# Altium PCB LV-BMS_V2_21E.PcbDoc (part 1 of 2)
Units mil, origin at the board's own origin, x right, y up, seen from the top; angles counter-clockwise.
Board outline 5497.15 x 1737.62 mil, 4 copper layers (Top Layer, GND, VCC, Bottom Layer), stack 30.634 mil thick; 163 components, 85 nets, 905 pads, 78 vias.
Unrouted connection lines stored in the file: 5.
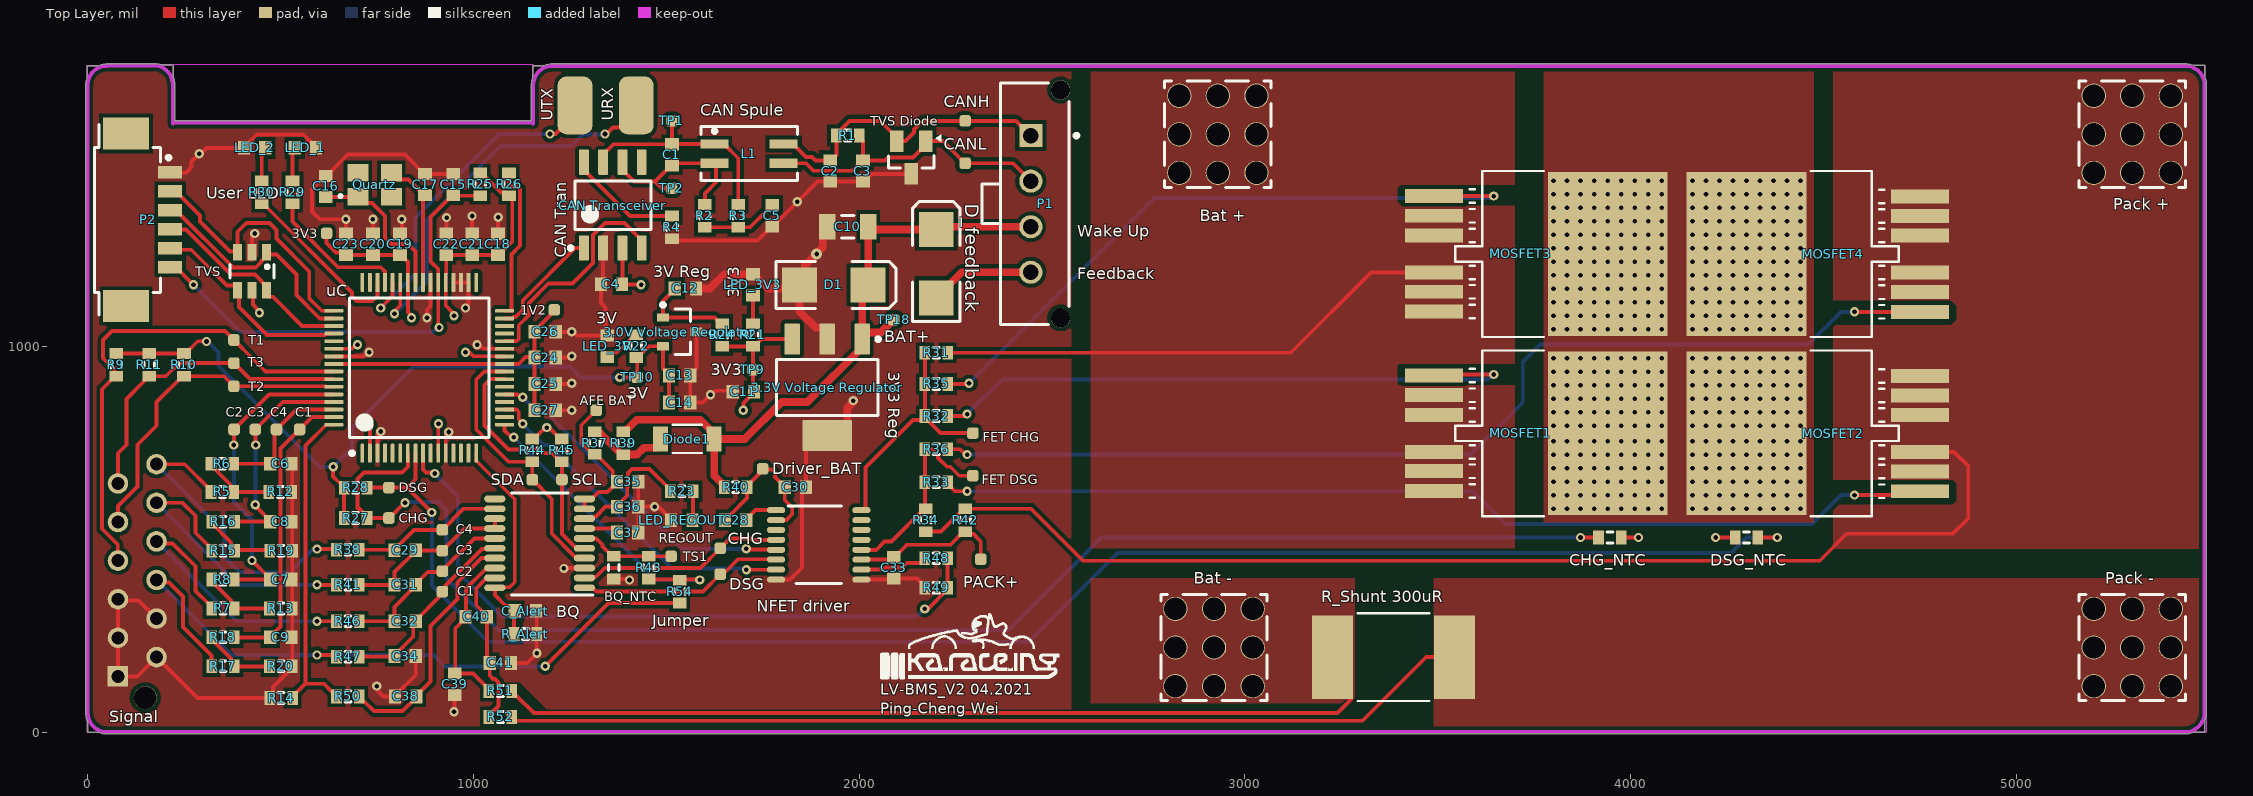
[diagram p0: Top Layer view]
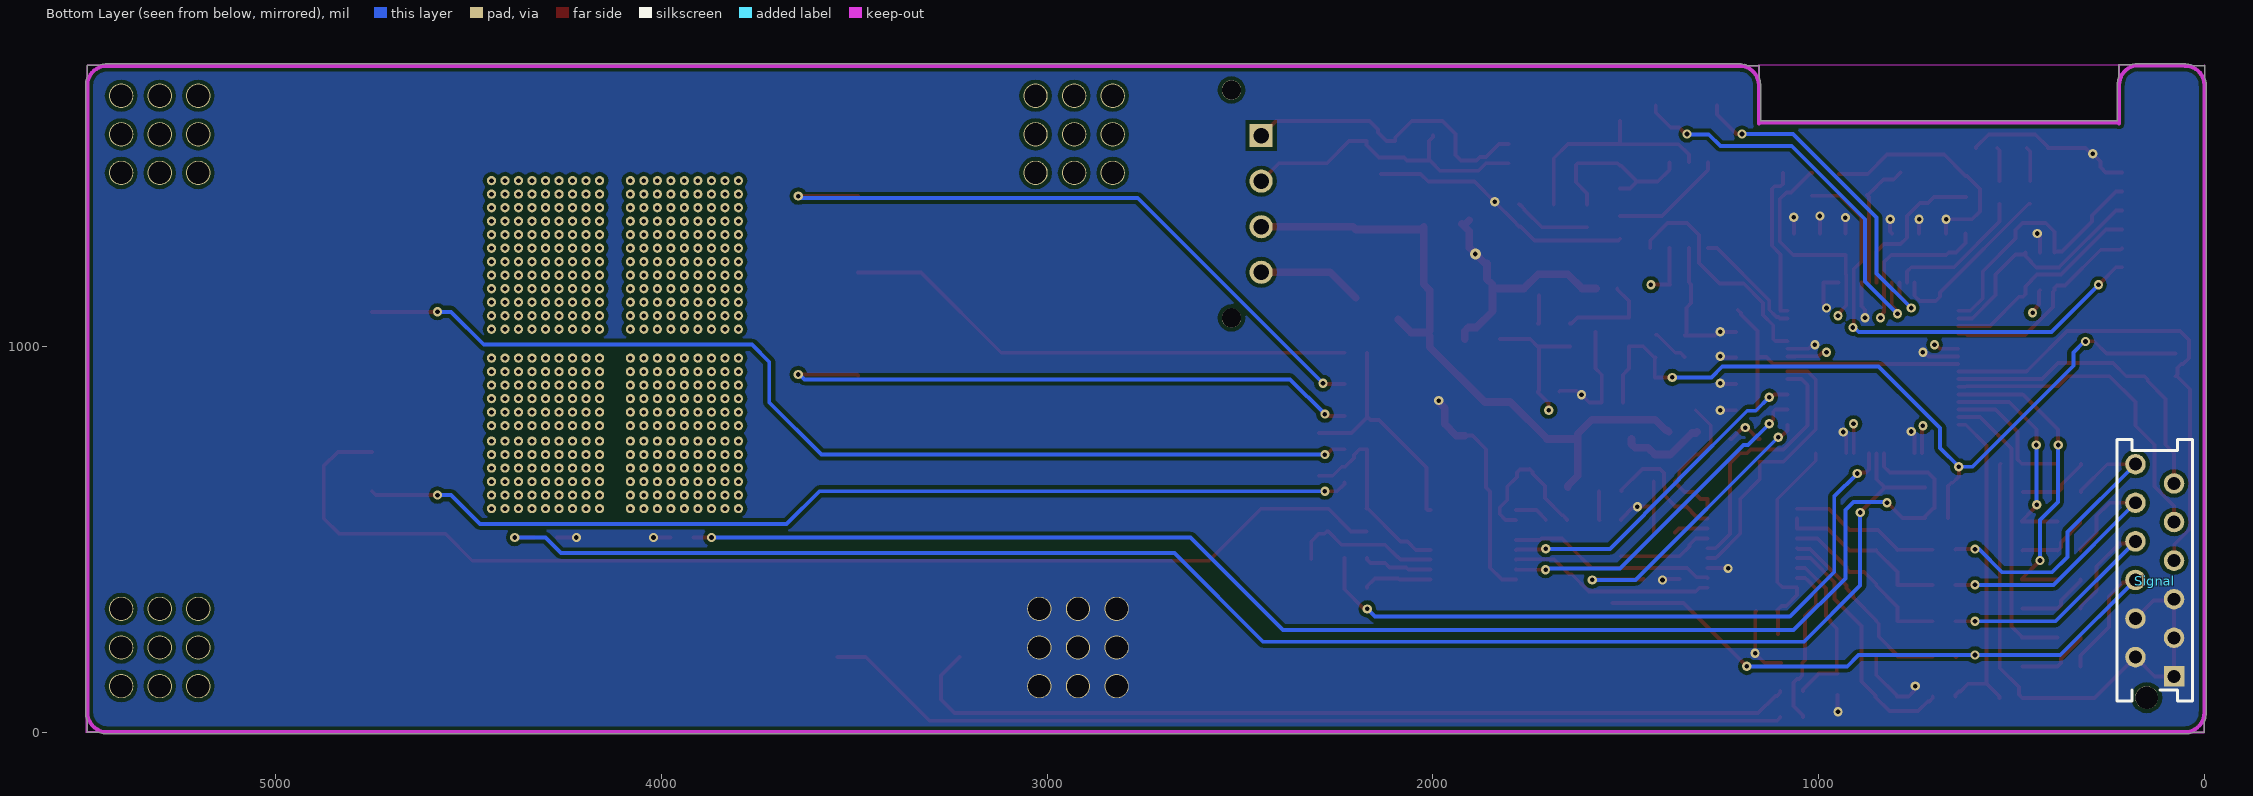
[diagram p1: Bottom Layer view, seen from below]
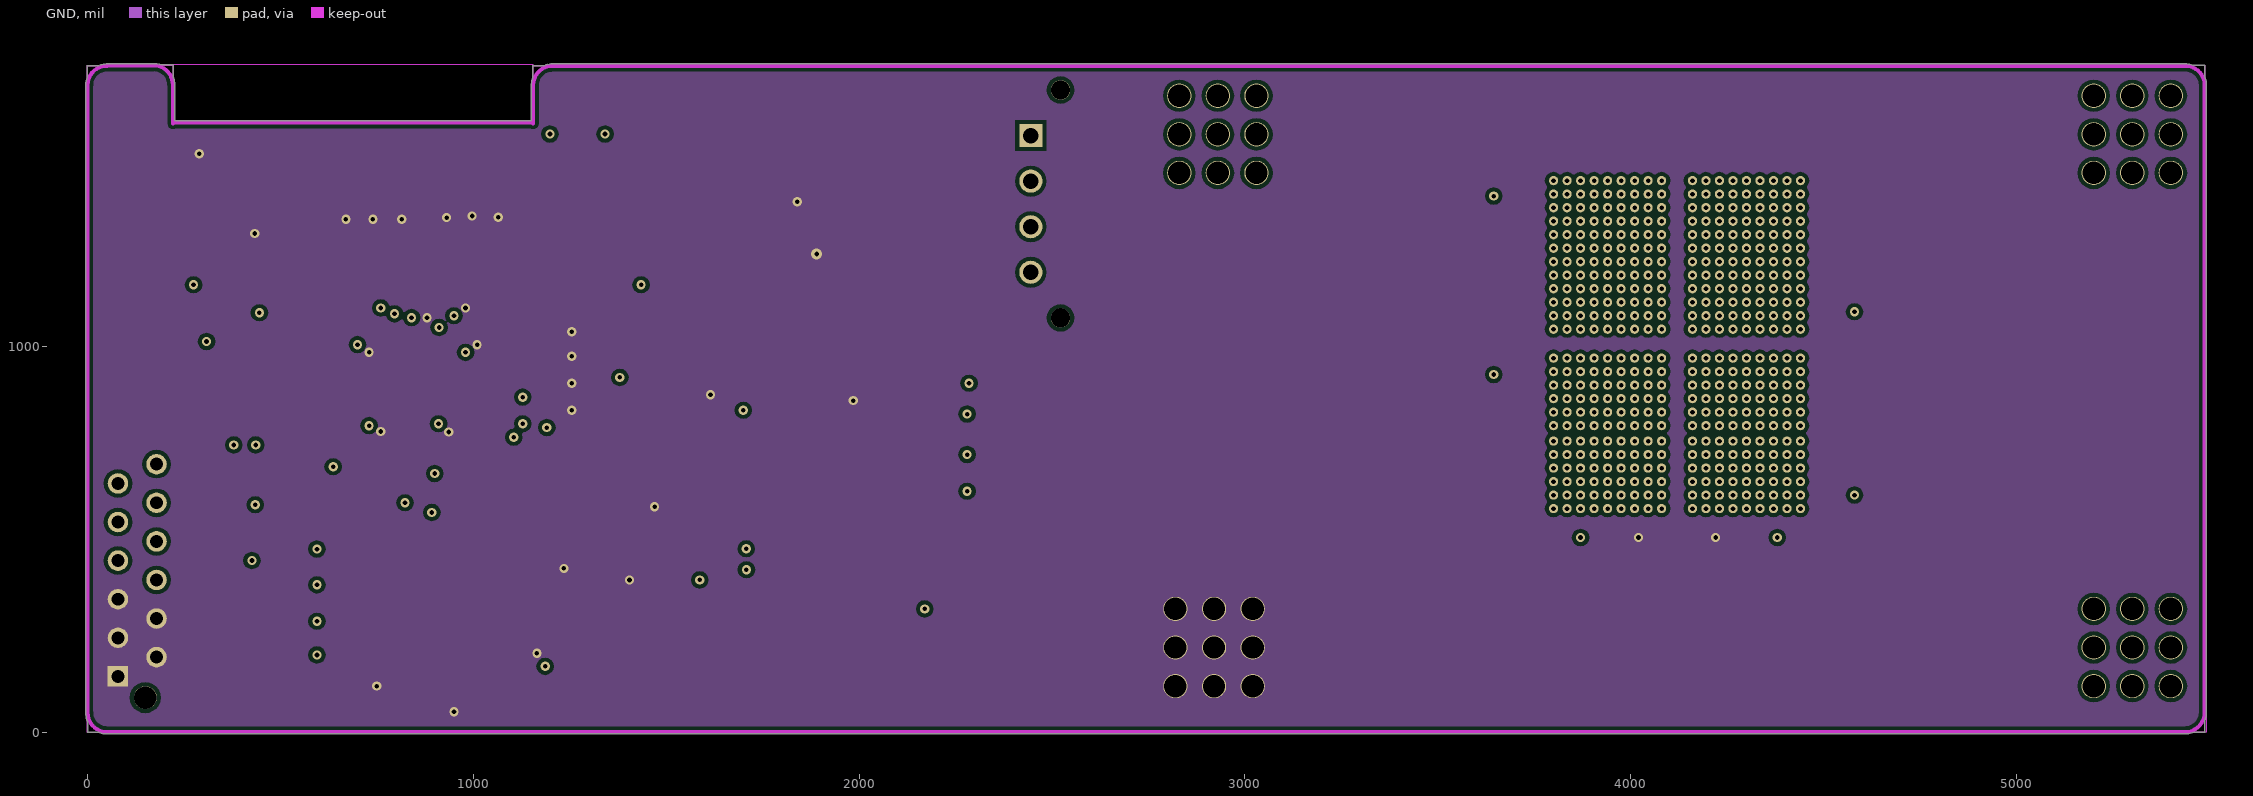
[diagram p2: GND]
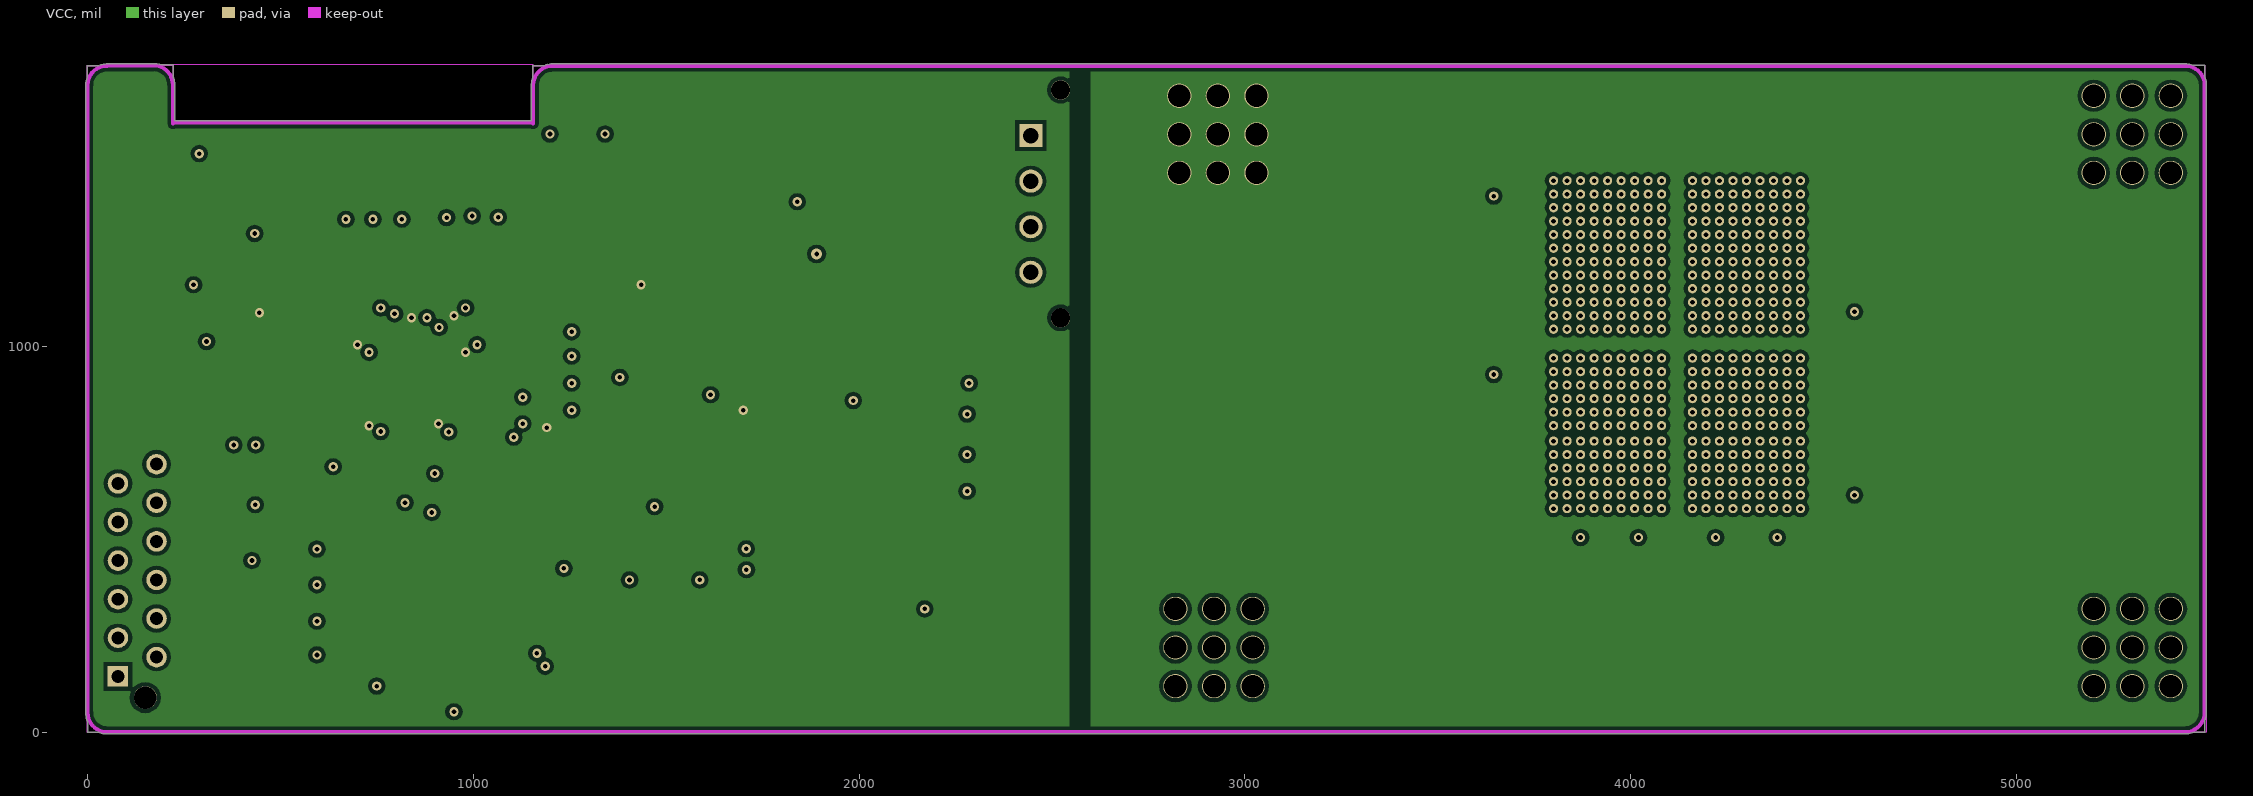
[diagram p3: VCC]

## Layer stack, top to bottom
Top Solder: solder mask 0.4, Solder Resist, Dk 3.5
Top Layer: signal copper 1.4
Dielectric 2: core 10, PP-006, Dk 4.2
GND: signal copper 1.417
Dielectric 1: prepreg 5, FR-4, Dk 4.2
VCC: signal copper 1.417
Dielectric 3: core 10, PP-006, Dk 4.2
Bottom Layer: signal copper 1.4
Bottom Solder: solder mask 0.4, Solder Resist, Dk 3.5

## Board outline
0.37,1.24 0.37,28.37 cw(c50.13,50.6) -4.36,50.27 cw(c0.12,52.53) -4.9,52.53 -4.9,1677.14 cw(c0.12,1677.14) -4.35,1679.42 cw(c50.13,1678.08) -0.9,1697.22 -0.9,1727.56 cw(c-0.38,1727.56) -0.59,1728.03 cw(c-0.12,1727.82) -0.12,1728.34 29.05,1728.34 cw(c50.13,1678.08) 49.06,1732.57 cw(c50.57,1727.79) 50.57,1732.8 168.87,1732.8 cw(c171.53,1728.55) 171.51,1733.56 cw(c171.74,1679.06) 190.88,1730.09 221.23,1730.09 cw(c221.23,1729.58) 221.71,1729.75 cw(c222,1729.32) 222.51,1729.32 222.51,1698.88 cw(c171.74,1679.06) 226.24,1679.52 cw(c221.82,1677.14) 226.84,1677.14 cw(c221.82,1677.14) 226.84,1677.14 226.83,1585.02 1150.12,1585.02 1150.12,1677.56 cw(c1155.13,1677.56) 1150.66,1679.83 cw(c1205.13,1678.08) 1154.1,1697.22 1154.1,1727.56 cw(c1154.62,1727.56) 1154.41,1728.03 cw(c1154.88,1727.82) 1154.88,1728.34 1184.05,1728.34 cw(c1205.13,1678.08) 1205.37,1732.58 cw(c1205.13,1678.08) 1205.37,1732.58 5437.02,1732.58 cw(c5437.02,1727.56) 5437.17,1732.58 cw(c5437.32,1727.56) 5437.3,1732.58 cw(c5437.54,1678.08) 5456.67,1729.11 5487.02,1729.11 cw(c5487.02,1728.59) 5487.49,1728.81 cw(c5487.28,1728.34) 5487.79,1728.34 5487.79,1699.16 cw(c5437.54,1678.08) 5492.03,1679.04 cw(c5487.23,1677.56) 5492.25,1677.56 5492.25,51.33 cw(c5487.23,51.33) 5492.03,49.87 cw(c5437.54,50.6) 5488.05,30.14 5488.05,1.33 cw(c5487.54,1.33) 5487.75,0.86 cw(c5487.28,1.07) 5487.28,0.56 5459.12,0.56 cw(c5437.54,50.6) 5440.82,-3.8 cw(c5439.26,0.96) 5439.26,-4.05 49.57,-4.05 cw(c49.57,0.96) 48.22,-3.87 cw(c50.13,50.6) 28.76,0.47 1.15,0.47 cw(c1.15,0.98) 0.68,0.77 cw(c0.89,1.24)
cut-out: 171.74,1728.55 cw(c171.74,1729.06) 171.74,1729.58 cw(c171.74,1679.06) 176.24,1729.38 cw(c176.72,1729.58) 176.72,1730.09 221.23,1730.09 cw(c221.23,1729.58) 221.7,1729.79 cw(c221.48,1729.32) 222,1729.32 222,1684.81 cw(c221.48,1684.81) 221.95,1684.6 cw(c171.74,1679.06) 222.26,1679.06 cw(c221.74,1679.06) 221.23,1679.06 ccw(c171.74,1679.06)
cut-out: 5440.13,0.08 cw(c5440.13,0.6) 5440.13,1.11 ccw(c5440.13,50.6) 5489.62,50.6 cw(c5490.13,50.6) 5490.65,50.6 cw(c5440.13,50.6) 5490.45,46.1 cw(c5490.65,45.62) 5491.16,45.62 5491.16,1.11 cw(c5490.65,1.11) 5490.86,0.64 cw(c5490.39,0.86) 5490.39,0.34 5445.88,0.34 cw(c5445.88,0.86) 5445.67,0.39 cw(c5440.13,50.6)
cut-out: -0.12,0.34 -0.12,44.85 cw(c0.39,44.85) -0.08,45.07 cw(c50.13,50.6) -0.38,50.6 cw(c0.13,50.6) 0.65,50.6 ccw(c50.13,50.6) 50.13,1.11 cw(c50.13,0.6) 50.65,0.6 cw(c50.13,0.6) 50.13,0.08 cw(c50.13,50.6) 45.63,0.29 cw(c45.16,0.08) 45.67,0.08 cw(c45.16,0.08) 45.16,-0.43 0.65,-0.43 cw(c0.65,0.08) 0.18,-0.13 cw(c0.39,0.34)
cut-out: 1154.1,1683.05 ccw(c1154.62,1683.05) 1154.82,1682.58 ccw(c1205.13,1678.08) 1154.62,1678.08 ccw(c1155.13,1678.08) 1155.65,1678.08 cw(c1205.13,1678.08) 1205.13,1727.56 ccw(c1205.13,1728.08) 1205.65,1728.08 ccw(c1205.13,1728.08) 1205.13,1728.59 ccw(c1205.13,1678.08) 1199.6,1728.29 ccw(c1199.39,1727.82) 1199.39,1728.34 1154.88,1728.34 ccw(c1154.88,1727.82) 1154.41,1728.03 ccw(c1154.62,1727.56) 1154.1,1727.56
cut-out: 5437.54,1727.56 cw(c5437.54,1728.08) 5437.54,1728.59 cw(c5437.54,1678.08) 5442.04,1728.39 cw(c5442.51,1728.59) 5442.51,1729.11 5487.02,1729.11 cw(c5487.02,1728.59) 5487.49,1728.81 cw(c5487.28,1728.34) 5487.79,1728.34 5487.79,1683.83 cw(c5487.28,1683.83) 5487.75,1683.61 cw(c5437.54,1678.08) 5488.05,1678.08 cw(c5487.54,1678.08) 5487.02,1678.08 ccw(c5437.54,1678.08)
cut-out: -0.18,1682.58 cw(c-0.38,1683.05) -0.9,1683.05 -0.9,1727.56 cw(c-0.38,1727.56) -0.74,1727.93 -0.23,1728.44 cw(c0.13,1728.08) 0.58,1728.34 44.39,1728.34 cw(c44.39,1727.82) 44.6,1728.29 cw(c50.13,1678.08) 50.13,1728.59 cw(c50.13,1728.08) 50.65,1728.08 cw(c50.13,1728.08) 50.13,1727.56 ccw(c50.13,1678.08) 0.65,1678.08 cw(c0.13,1678.08) -0.38,1678.08 cw(c50.13,1678.08)
cut-out: -0.38,1678.08 ccw(c0.13,1678.08) 0.65,1678.08 cw(c50.13,1678.08) 50.13,1727.56 ccw(c50.13,1728.08) 50.65,1728.08 ccw(c50.13,1728.08) 50.13,1728.59 ccw(c50.13,1678.08)
cut-out: 221.11,1580 1155,1580 1155,1730 221.11,1730

## Design rules (kind name [scope] priority, off if disabled: settings)
Clearance "Stitching GND" [IsStitchingVia and InNet('GND') vs (IsVia and (Not IsStitchingVia)) Or IsPad] p1: gap=5 ignorepadtopadclearanceinfootprint=FALSE
Clearance "Stitching No Net_1" [IsStitchingVia and InNet('No Net') vs (IsVia and (Not IsStitchingVia)) Or IsPad] p2: gap=5 ignorepadtopadclearanceinfootprint=FALSE
Clearance "Stitching No Net" [IsStitchingVia and InNet('No Net') vs (IsVia and (Not IsStitchingVia)) Or IsPad] p3: gap=5 ignorepadtopadclearanceinfootprint=FALSE
Clearance [All] p4: gap=10 ignorepadtopadclearanceinfootprint=FALSE except(0: Arc-Hole Track-Hole SMDPad-Hole THPad-Hole Via-Hole Fill-Hole Poly-Hole Region-Hole Text-Hole; 6: Arc-Arc Arc-Track Arc-SMDPad Track-Track Track-SMDPad SMDPad-SMDPad SMDPad-THPad THPad-THPad)
HoleSize [All] p1: absolutevalues=TRUE maxlimit=275.59 minlimit=1 maxpercent=80.000 minpercent=20.000
MinimumSolderMaskSliver [All] p1: minsoldermaskwidth=3.94
PolygonConnect PolygonConnectNetQ2Vias [InNet('NetQ2_3') vs IsVia] p1: connectstyle=Direct reliefconductorwidth=10 reliefentries=4 polygonreliefangle="90 Angle" airgapwidth=10
PolygonConnect PolygonConnectNetQ2 [InNet('NetQ2_3')] p2: connectstyle=Relief reliefconductorwidth=60 reliefentries=4 polygonreliefangle="90 Angle" airgapwidth=10
PolygonConnect PolygonConnectPinShunt [InNet('CGND') vs HasFootprint('7461096_Chemical Surface')] p3: connectstyle=Direct reliefconductorwidth=10 reliefentries=4 polygonreliefangle="90 Angle" airgapwidth=10
PolygonConnect PolygonConnectPin2 [InNet('GND') vs HasFootprint('7461096_Chemical Surface')] p4: connectstyle=Direct reliefconductorwidth=10 reliefentries=4 polygonreliefangle="90 Angle" airgapwidth=10
PolygonConnect PolygonConnectPin [InNet('SHUNT')] p5: connectstyle=Relief reliefconductorwidth=30 reliefentries=4 polygonreliefangle="90 Angle" airgapwidth=10
PolygonConnect PolygonConnect_AFE_CGND [InNet('CGND')] p6: connectstyle=Relief reliefconductorwidth=30 reliefentries=4 polygonreliefangle="90 Angle" airgapwidth=10
PolygonConnect PolygonConnectShunt [InNet('GND') vs HasFootprint('R3920')] p7: connectstyle=Direct reliefconductorwidth=10 reliefentries=4 polygonreliefangle="90 Angle" airgapwidth=10
PolygonConnect PolygonConnect_via [All vs IsVia] p8: connectstyle=Direct reliefconductorwidth=10 reliefentries=4 polygonreliefangle="90 Angle" airgapwidth=10
PolygonConnect PolygonConnectRest [All] p9: connectstyle=Relief reliefconductorwidth=10 reliefentries=4 polygonreliefangle="90 Angle" airgapwidth=10
RoutingVias [All] p1: holewidth=12 width=24 viastyle="Through Hole" minholewidth=6 minwidth=12 maxholewidth=18 maxwidth=36
SilkToSilkClearance [All] p1: silktosilkclearance=0
SilkToSolderMaskClearance [IsPad] p1: minsilkscreentomaskgap=0 clearancetoexposedcopper=TRUE
SolderMaskExpansion [All] p1: expansion=1.97 istentingtop=FALSE
Width [All] p1: maxlimit=300 minlimit=10 preferedwidth=10
26 further rules are at their usual default settings.

## Classes and differential pairs
component class uC: 1V2 3V3 C15 C16 C17 C18 C19 C20 C21 C22 C23 C24 C25 C26 C27 CHG CHG_NTC DSG DSG_NTC LED_1 LED_2 P2 Quartz R25 R26 R27 R28 R29 R30 TVS uC URX UTX
component class "Power_Supply Voltage": "3.0V Voltage Regulator" "3.3V Voltage Regulator" C10 C11 C12 C13 C14 D1 LED_3V LED_3V3 LED_REGOUT R21 R22 R23 R24 TP9 TP10
component class "Eingang_Ausgang Signal": C1 C2 C3 C4 C5 C6 C7 C8 C9 CANH CANL D_feedback L1 P1 q R1 R2 R3 R4 R5 R6 R7 R8 R9 R10 R11 R12 R13 R14 R15 R16 R17 R18 R19 R20 Signal T1 T2 T3 TP1 TP2 TP18 "TVS Diode"
component class AFE_BQ-Chip: "AFE BAT" "Bat +" "Bat -" BQ BQ_NTC C1 C2 C3 C4 C28 C29 C30 C31 C32 C33 C34 C35 C36 C37 C38 C39 C40 C41 C_Alert CHG Diode1 Driver_BAT DSG "FET CHG" "FET DSG" MOSFET1 MOSFET2 MOSFET3 MOSFET4 "NFET driver" "Pack +" "Pack -" PACK+ R31 R32 R33 R34 R35 R36 R37 R38 R39 R40 R41 R42 R43 R44 R45 R46 R47 R48 R49 R50 R51 R52 R54 R_Alert "R_Shunt 300uR" SCL SDA TS1

## Components (designator, comment, footprint, x,y, rotation, side; value= is the part's Value field where it differs from the comment)
1V2 "TP_1" "Test point"#1 1035.13,883.08 r90 top locked
"3.0V Voltage Regulator" "REF3030AIDBZR" DBZ0003A_L 1535,1038.08 r0 top
"3.3V Voltage Regulator" "LM2937IMP-3.3/NOPB" DCY0004A_M 1917.46,894.18 r270 top
3V3 "TP_1" "Test point"#2 619.79,1293.47 r90 top
"AFE BAT" "TP_1" "Test point"#2 1318.94,835 r90 top (schematic designator AFE_BAT)
"Bat +" "M4x6mm" "7461096_for chemical surfaces" 2930,1550 r0 top
"Bat -" "M4x6mm" "7461096_for chemical surfaces" 2920,220 r0 top
BQ "BQ7692000PW" PW0020A_N 1172.09,490.02 r180 top value=Value
BQ_NTC "10kR" J1-0603 1364.53,427.08 r270 top
C1 "100pF" 1608[0603] 1515,1496.67 r90 top
C1 "TP_1" "Test point"#3 920,361.97 r90 top locked (schematic designator TP_Cell_1)
C1 "TP_1" "Test point"#4 499.82,785 r90 top locked (schematic designator C1_uC)
C2 "200pF" 1608[0603] 1925,1455 r90 top value=220nF
C2 "TP_1" "Test point"#3 920,415 r90 top locked (schematic designator TP_Cell_2)
C2 "TP_1" "Test point"#5 319.82,785 r90 top locked (schematic designator C2_uC)
C3 "200pF" 1608[0603] 2010,1455 r90 top value=220nF
C3 "TP_1" "Test point"#2 920,471.16 r180 top (schematic designator TP_Cell_3)
C3 "TP_1" "Test point"#4 384.82,785 r90 top locked (schematic designator C3_uC)
C4 "220nF" 1608[0603] 1358.24,1161.16 r0 top
C4 "TP_1" "Test point"#2 920,525 r180 top (schematic designator TP_Cell_4)
C4 "TP_1" "Test point"#6 449.82,785 r90 top locked (schematic designator C4_uC)
C5 "4n7F" 1608[0603] 1775,1339 r90 top value=220nF
C6 "200pF" 1608[0603] 501.37,696.16 r180 top value=220nF
C7 "200pF" 1608[0603] 501.37,396.16 r180 top value=220nF
C8 "200pF" 1608[0603] 501.37,546.16 r180 top value=220nF
C9 "200pF" 1608[0603] 501.37,246.16 r180 top value=220nF
C10 "100nF" C1206 1970.61,1310.62 r0 top value=220nF
C11 "10uF" 1608[0603] 1700,883.08 r0 top value=220nF
C12 "10uF" 1608[0603] 1550,1150.63 r180 top value=220nF
C13 "10uF" 1608[0603] 1535,925 r180 top value=220nF
C14 "10uF" 1608[0603] 1535,855 r180 top value=220nF
C15 "470nF" 1608[0603] 948,1420 r90 top value=220nF
C16 "15pF" 1608[0603] 617.83,1414.88 r90 top value=220nF
C17 "15pF" 1608[0603] 875,1420 r90 top value=220nF
C18 "1uF" 1608[0603] 1064,1265 r90 top value=220nF
C19 "100nF" 1608[0603] 810,1265 r90 top value=220nF
C20 "100nF" 1608[0603] 740,1265 r90 top value=220nF
C21 "100nF" 1608[0603] 997,1265 r90 top value=220nF
C22 "100nF" 1608[0603] 930,1265 r90 top value=220nF
C23 "100nF" 1608[0603] 670,1265 r90 top value=220nF
C24 "2.2uF" 1608[0603] 1186.29,971.5 r0 top value=220nF
C25 "1uF" 1608[0603] 1186.29,903 r0 top value=220nF
C26 "100nF" 1608[0603] 1186.29,1038.08 r0 top value=220nF
C27 "100nF" 1608[0603] 1186.29,835 r0 top value=220nF
C28 "2.2uF" 1608[0603] 1680,550 r180 top value=220nF
C29 "1uF" 1608[0603] 823.54,472.34 r180 top value=220nF
C30 "10nF" 1608[0603] 1835,635 r180 top value=220nF
C31 "1uF" 1608[0603] 823.54,382.34 r180 top value=220nF
C32 "1uF" 1608[0603] 823.54,288.13 r180 top value=220nF
C33 "10nF" 1608[0603] 2090,426.83 r270 top value=220nF
C34 "1uF" 1608[0603] 823.54,197.77 r180 top value=220nF
C35 "10uF" 1608[0603] 1400,650 r0 top value=220nF
C36 "4.7uF" 1608[0603] 1400,585 r0 top value=220nF
C37 "1uF" 1608[0603] 1400,518 r0 top value=220nF
C38 "1uF" 1608[0603] 825.13,93.16 r0 top value=220nF
C39 "100nF" 1608[0603] 951.85,124.62 r270 top value=220nF
C40 "100nF" 1608[0603] 1007.64,300 r180 top value=220nF
C41 "100nF" 1608[0603] 1070.17,179.94 r180 top value=220nF
C_Alert "470pF" 1608[0603] 1135,315 r0 top value=220nF
"CAN Transceiver" "SN65HVD230D" D0008A_M 1361.69,1366.56 r90 top
CANH "TP_1" "Test point"#2 2275,1585 r90 top
CANL "TP_1" "Test point"#2 2275,1475 r90 top
CHG "TP_1" "Test point"#2 1640.14,477.22 r90 top
CHG "TP_1" "Test point"#7 657.69,555.24 r90 top (schematic designator T_CHG)
CHG_NTC "10kR" J1-0603 3946,505 r0 top
D1 "D Zener" SMB 1934.02,1160 r0 top
D_feedback "Diode" SMB 2200,1215 r90 top
Diode1 "LL4148-GS08" MELF_SOD-80_VIS 1554.81,760.56 r0 top
Driver_BAT "TP_1" "Test point"#2 1750,683.08 r90 top
DSG "TP_1" "Test point"#2 1640.14,410 r90 top
DSG "TP_1" "Test point"#8 657.69,635.56 r90 top (schematic designator T_DSG)
DSG_NTC "10kR" J1-0603 4300,505 r180 top
"FET CHG" "TP_1" "Test point"#2 2295,775.75 r180 top (schematic designator FET_CHG)
"FET DSG" "TP_1" "Test point"#9 2285,665.1 r90 top (schematic designator FET_DSG)
L1 "100 µH" WE-SLM 1715,1500 r0 top
LED_1 "" 1608[0603] 565,1515 r0 top
LED_2 "" 1608[0603] 433.39,1515 r180 top
LED_3V "LED_3V" 1608[0603] 1347.49,1000.68 r90 top
LED_3V3 "LED_3V3" 1608[0603] 1725,1160 r90 top
LED_REGOUT "LED_3V" 1608[0603] 1540.47,550 r180 top
MOSFET1 "IRFS7430TRLPBF" D2PAK_TO-263AB_INF-M 3810,775 r270 top
MOSFET2 "IRFS7430TRLPBF" D2PAK_TO-263AB_INF-M 4430,775 r90 top
MOSFET3 "IRFS7430TRLPBF" D2PAK_TO-263AB_INF-M 3810,1240 r270 top
MOSFET4 "IRFS7430TRLPBF" D2PAK_TO-263AB_INF-M 4430,1240 r90 top
"NFET driver" "BQ76200PW" PW0016A_L 1895,486 r0 top value=Value
P1 "66200411122" 66200411122 2455.17,1369.67 r90 top
P2 "653106131822" 653106131822 103.94,1328.43 r270 top
"Pack +" "Fahrzeug_VCC" "7461096_for chemical surfaces" 5300,1550 r0 top
"Pack -" "Fahrzeug_GND" "7461096_for chemical surfaces" 5300,220 r0 top
PACK+ "TP_1" "Test point"#2 2315.47,448.75 r90 top
Quartz "16MHz" WE-XTAL_CFPX-180 744.52,1419.3 r0 top
R1 "120R" J1-0603 1970.61,1546.84 r180 top value=10kR
R2 "60R" J1-0603 1600.35,1338.8 r90 top value=10kR
R3 "60R" J1-0603 1686.94,1338.8 r90 top value=10kR
R4 "10kR" J1-0603 1515,1308.89 r90 top
R5 "51kR" J1-0603 349.98,623.08 r180 top value=10kR
R6 "10kR" J1-0603 349.98,696.16 r180 top
R7 "51kR" J1-0603 351.37,321.16 r180 top value=10kR
R8 "10kR" J1-0603 351.37,396.16 r180 top
R9 "470R" J1-0603 75.13,952.61 r90 top value=10kR
R10 "470R" J1-0603 250.13,952.61 r90 top value=10kR
R11 "470R" J1-0603 160.13,952.61 r90 top value=10kR
R12 "10kR" J1-0603 499.98,623.08 r180 top
R13 "10kR" J1-0603 501.37,321.16 r180 top
R14 "Jumper" J1-0603 502.18,89 r180 top value=10kR
R15 "51kR" J1-0603 351.84,471.16 r180 top value=10kR
R16 "10kR" J1-0603 351.84,546.16 r180 top
R17 "51kR" J1-0603 351.37,171.16 r180 top value=10kR
R18 "10kR" J1-0603 351.37,246.16 r180 top
R19 "10kR" J1-0603 501.84,471.16 r180 top
R20 "10kR" J1-0603 501.37,171.16 r180 top
R21 "680R" J1-0603 1725,1030 r90 top value=10kR
R22 "680R" J1-0603 1422.56,1001.02 r90 top value=10kR
R23 "680R" J1-0603 1540.47,625 r0 top value=10kR
R24 "0R (or 100mH Spule 0805)" J1-0603 1645,1030 r270 top value=10kR
R25 "1kR" J1-0603 1017.83,1420.32 r270 top value=10kR
R26 "1MR" J1-0603 1092.83,1420.32 r90 top value=10kR
R27 "470R" J1-0603 694.95,555.56 r0 top value=10kR
R28 "470R" J1-0603 694.95,634.34 r0 top value=10kR
R29 "470R" J1-0603 531.37,1399.58 r90 top value=10kR
R30 "470R" J1-0603 451.79,1399.61 r90 top value=10kR
R31 "5.1MR" J1-0603 2200,983.87 r180 top value=10kR
R32 "680R" J1-0603 2200,820 r0 top value=10kR
R33 "680R" J1-0603 2200,648.03 r180 top value=10kR
R34 "5.1MR" J1-0603 2172.4,550 r270 top value=10kR
R35 "680R" J1-0603 2200,903 r0 top value=10kR
R36 "680R" J1-0603 2200,733.83 r180 top value=10kR
R37 "100R" J1-0603 1315,750 r90 top value=10kR
R38 "100R" J1-0603 675.27,473.37 r180 top value=10kR
R39 "10kR" J1-0603 1388.56,749.5 r90 top
R40 "100R" J1-0603 1680,635 r0 top value=10kR
R41 "100R" J1-0603 675.27,382.34 r180 top value=10kR
R42 "100R" J1-0603 2275,550 r90 top value=10kR
R43 "10kR" J1-0603 1454.53,427.08 r90 top
R44 "10kR" J1-0603 1153.29,731.03 r270 top
R45 "10kR" J1-0603 1229.55,731.03 r270 top
R46 "100R" J1-0603 675.27,288.13 r180 top value=10kR
R47 "100R" J1-0603 675.27,196.28 r180 top value=10kR
R48 "270kR" J1-0603 2200,451.63 r180 top value=10kR
R49 "12kR" J1-0603 2200,374.86 r0 top value=10kR
R50 "100R" J1-0603 675.13,93.16 r180 top value=10kR
R51 "100R" J1-0603 1070.17,107.32 r0 top value=10kR
R52 "100R" J1-0603 1070.17,40 r0 top value=10kR
R54 "Jumper" J1-0603 1535,365 r270 top value=10kR
R_Alert "1MR" J1-0603 1135,255 r0 top value=10kR
"R_Shunt 300uR" "LRMAP3920B-R0003FT" RES_LRMAP3920B-R0003FT_WEL 3385,195 r0 top
SCL "TP_1" "Test point"#2 1230,655 r90 top
SDA "TP_1" "Test point"#10 1155,650 r90 top
Signal "690367181272" 690367181272 129.13,420.12 r270 bottom
T1 "TP_1" "Test point"#2 379.81,1016.98 r90 top locked
T2 "TP_1" "Test point"#2 379.81,896.98 r90 top locked
T3 "TP_1" "Test point"#2 379.81,956.98 r90 top locked
TP1 "TP_1" "Test point"#2 1515,1585 r90 top
TP2 "TP_1" "Test point"#2 1515,1410 r90 top
TP9 "TP_1" "Test point"#11 1725,1143.08 r90 top locked
TP10 "TP_1" "Test point"#12 1285.13,883.08 r90 top locked
TP18 "TP_1" "Test point"#13 2140.75,801.66 r0 top locked
TS1 "TP_1" "Test point"#2 1512.91,456.61 r90 top
TVS "3.3Vdc" WE-TVS_SOT23-6L 426.53,1195 r180 top
"TVS Diode" "824022" SOT23_3L 2135,1490 r270 top
uC "TM4C123GH6PMT" PM0064A_L 860,945 r90 top
URX "UR" "UR Pad" 1422.56,1625 r0 top
UTX "UR" "UR Pad" 1263.84,1625 r0 top

## Footprints (in the part's own frame and the unit in brackets; to place one, negate y for a bottom-side part, rotate by r counter-clockwise, add the part's x,y. Pads: shape width x height; smd on the part's side, far side on the other; paste and mask are expansions set on the pad)
1608[0603] [mm] "Chip Capacitor, Body 1.6x0.8mm, IPC High Density"
  rect 0.8x0.9 smd: 1(-0.7,0) 2(0.7,0)
  body extent -0.87,-0.48 0.87,0.48, height 1.3
"7461096_for chemical surfaces" [mm] "M4, thread 6mm"
  round 1.6 hole 1.475: 1(-2.54,-2.54) 1(-2.54,0) 1(-2.54,2.54) 1(0,-2.54) 1(0,0) 1(0,2.54) 1(2.54,-2.54) 1(2.54,0) 1(2.54,2.54)
  silkscreen extent -3.5,-3.5 3.5,3.5, body extent -3.5,-3.5 3.5,3.5, height 9
66200411122 [mm] "3.00mm Male Single Row Vertical Header, 4p"
  rect 1.52x1.52 hole 1.02: 1(4.5,0.255)
  round 1.52 hole 1.02: 2(1.5,0.255) 3(-1.5,0.255) 4(-4.5,0.255)
  round 1.27 hole 1.27 unplated: MH1(-7.5,-1.705) MH2(7.5,-1.705)
  silkscreen extent -7.95,-2.88 7.95,3.46, body extent -7.82,-2.19 7.83,3.38, height 9.93
653106131822 [mm] "1.25mm SMT Male Horizontal Shrouded Header, 6p"
  rect 0.81x1.6 smd: 1(-3.125,2.8) 2(-1.875,2.8) 3(-0.625,2.8) 4(0.625,2.8) 5(1.875,2.8) 6(3.125,2.8)
  rect 2.1x3 smd: MP1(-5.675,-0.1) MP2(5.675,-0.1)
  silkscreen extent -6.27,-2.17 6.27,2.82, body extent -6.13,-2.1 6.13,3.3, height 3.4
690367181272 [mm] "MiniModule Connectors, PCB Type, Female, THT, Vertical, 12p"
  rect 1.35x1.35 hole 0.85: 1(6.985,1.27)
  round 1.35 hole 0.85: 2(5.715,-1.27) 3(4.445,1.27) 4(3.175,-1.27) 5(1.905,1.27) 6(0.635,-1.27) 7(-0.635,1.27) 8(-1.905,-1.27) 9(-3.175,1.27) 10(-4.445,-1.27) 11(-5.715,1.27) 12(-6.985,-1.27)
  round 1.5 hole 1.5 unplated: MH1(8.385,-0.53)
  silkscreen extent -8.62,-2.5 8.62,2.5, body extent -8.62,-2.5 8.62,2.5, height 4.25
C1206 [mm] "Chip Capacitor, Body 3.2x1.6mm, IPC High Density"
  rect 1.1x1.7 smd: 1(-1.35,0) 2(1.35,0)
  silkscreen extent -0.4,-0.75 0.4,0.75, body extent -1.7,-0.9 1.7,0.9, height 1.3
D2PAK_TO-263AB_INF-M [mil]
  rect 36x150 smd paste+0 mask+0: 1(-150,-320) 3(-99,-320) 3(-48,-320) 3(48,-320) 3(98,-320) 3(149,-320)
  rect 424x310 smd paste+0 mask+0: 2(0,130)
  silkscreen extent -215,-265 215,-36, body extent 0,0 10,10, height 10
D0008A_M [mm] "SOIC, 8-Leads, Body 5x4mm, Pitch 1.27mm, IPC Low Density"
  rrect15% 1.65x0.65 smd: 1(-2.825,1.905) 2(-2.825,0.635) 3(-2.825,-0.635) 4(-2.825,-1.905) 5(2.825,-1.905) 6(2.825,-0.635) 7(2.825,0.635) 8(2.825,1.905)
  silkscreen extent -2.95,-2.5 1.6,2.9, body extent -3,-2.45 3,2.45, height 1.63
DBZ0003A_L [mm] "SOT23, 3-Leads, Body 3.04x1.4mm, Pitch 0.95mm, IPC High Density"
  rrect18% 0.8x0.55 smd: 1(-1.1,0.95) 2(-1.1,-0.95) 3(1.1,0)
  silkscreen extent -1.22,-1.5 0.7,1.9, body extent -1.26,-1.46 1.26,1.46, height 0.96
DCY0004A_M [mm] "SOT223, 4-Leads, Body 6.7x3.7mm, Pitch 2.3mm, IPC Low Density"
  rrect10% 2.05x1 smd: 1(-3.175,2.3) 2(-3.175,0) 3(-3.175,-2.3)
  rrect5% 2.05x3.25 smd: 4(3.175,0)
  silkscreen extent -3.3,-3.35 1.85,3.48, body extent -3.5,-3.25 3.5,3.25, height 1.62
J1-0603 [mm] "Chip Resistor, Body 1.6x0.8mm, IPC High Density"
  rect 0.7x0.9 smd: 1(-0.75,0) 2(0.75,0)
  silkscreen extent -0.2,-0.35 0.2,0.35, body extent -0.85,-0.48 0.85,0.48, height 0.9
MELF_SOD-80_VIS [mil]
  rect 39x65 smd paste+0 mask+0: 1(-69.5,0) 2(69.5,0)
  silkscreen extent -38,-36 38,36, body extent 0,0 10,10, height 10
PM0064A_L [mm] "QFP, 64-Leads, Body 10x10mm, Pitch 0.5mm, IPC High Density"
  rrect40% 1.25x0.25 smd: 1(-5.625,3.75) 2(-5.625,3.25) 3(-5.625,2.75) 4(-5.625,2.25) 5(-5.625,1.75) 6(-5.625,1.25) 7(-5.625,0.75) 8(-5.625,0.25) 9(-5.625,-0.25) 10(-5.625,-0.75) 11(-5.625,-1.25) 12(-5.625,-1.75) 13(-5.625,-2.25) 14(-5.625,-2.75) 15(-5.625,-3.25) 16(-5.625,-3.75) 33(5.625,-3.75) 34(5.625,-3.25) 35(5.625,-2.75) 36(5.625,-2.25) 37(5.625,-1.75) 38(5.625,-1.25) 39(5.625,-0.75) 40(5.625,-0.25) 41(5.625,0.25) 42(5.625,0.75) 43(5.625,1.25) 44(5.625,1.75) 45(5.625,2.25) 46(5.625,2.75) 47(5.625,3.25) 48(5.625,3.75)
  rrect40% 0.25x1.25 smd: 17(-3.75,-5.625) 18(-3.25,-5.625) 19(-2.75,-5.625) 20(-2.25,-5.625) 21(-1.75,-5.625) 22(-1.25,-5.625) 23(-0.75,-5.625) 24(-0.25,-5.625) 25(0.25,-5.625) 26(0.75,-5.625) 27(1.25,-5.625) 28(1.75,-5.625) 29(2.25,-5.625) 30(2.75,-5.625) 31(3.25,-5.625) 32(3.75,-5.625) 49(3.75,5.625) 50(3.25,5.625) 51(2.75,5.625) 52(2.25,5.625) 53(1.75,5.625) 54(1.25,5.625) 55(0.75,5.625) 56(0.25,5.625) 57(-0.25,5.625) 58(-0.75,5.625) 59(-1.25,5.625) 60(-1.75,5.625) 61(-2.25,5.625) 62(-2.75,5.625) 63(-3.25,5.625) 64(-3.75,5.625)
  silkscreen extent -5.75,-4.6 4.6,4.6, body extent -6,-6 6,6, height 1.49
PW0016A_L [mm]
  oval 1.2x0.4 smd: 1(-2.794,2.286) 2(-2.794,1.626) 3(-2.793,0.984) 4(-2.794,0.33) 5(-2.794,-0.33) 6(-2.794,-0.965) 7(-2.794,-1.626) 8(-2.794,-2.286) 9(2.819,-2.286) 10(2.819,-1.626) 11(2.819,-0.965) 12(2.819,-0.33) 13(2.819,0.33) 14(2.819,0.991) 15(2.819,1.626) 16(2.819,2.286)
  silkscreen extent -2,-2.55 1.5,2.55, body extent 0,0 0.25,0.25, height 0.25
PW0020A_N [mm]
  oval 1.4x0.45 smd: 1(-2.95,2.925) 2(-2.95,2.275) 4(-2.95,0.975) 5(-2.95,0.325) 6(-2.95,-0.325) 11(2.95,-2.925) 12(2.95,-2.275)
  oval 1.4x0.45 smd paste+0 mask+0: 3(-2.95,1.625) 7(-2.95,-0.975) 8(-2.95,-1.625) 9(-2.95,-2.275) 10(-2.95,-2.925) 13(2.95,-1.625) 14(2.95,-0.975) 15(2.95,-0.325) 16(2.95,0.325) 17(2.95,0.975) 18(2.95,1.625) 19(2.95,2.275) 20(2.95,2.925)
  silkscreen extent -3.5,-3.3 1.85,3.4, body extent 0,0 0.25,0.25, height 0.25
RES_LRMAP3920B-R0003FT_WEL [mil]
  rect 106x217 smd paste+0 mask+0: 1(-158,0) 2(158,0)
  silkscreen extent -93,-114 93,114, body extent 0,0 10,10, height 10
SMB [mm] "DO-214-AA/SMB; 2 C-Bend Leads; Body 5.3 x 3.6 mm, inc. leads (LxW)"
  rect 2.3x2.3 smd: 1(-2.25,0) 2(2.25,0)
  silkscreen extent -3.8,-1.55 4.1,1.55
SOT23_3L [mm] "SOT23, 3-Leads, Body 2.9x2.4mm, Pitch 0.95mm"
  rect 1.4x0.9 smd: 1(-1.075,0.95) 2(-1.075,-0.95) 3(1.075,0)
  silkscreen extent -1.52,-1.5 0.7,1.97, body extent -1.2,-1.45 1.2,1.45, height 1.01
"Test point"#1 [mil]
  rrect50% 30x30 smd: 1(211.92,-174.87)
"Test point"#2 [mil]
  rrect50% 30x30 smd: 1(0,0)
"Test point"#3 [mil]
  rrect50% 30x30 smd: 1(3.03,0)
"Test point"#4 [mil]
  rrect50% 30x30 smd: 1(0,-50.18)
"Test point"#5 [mil]
  rrect50% 30x30 smd: 1(0,-60.18)
"Test point"#6 [mil]
  rrect50% 30x30 smd: 1(0,-40.18)
"Test point"#7 [mil]
  rrect50% 30x30 smd: 1(0.32,-123.72)
"Test point"#8 [mil]
  rrect50% 30x30 smd: 1(-1.22,-123.72)
"Test point"#9 [mil]
  rrect50% 30x30 smd: 1(0,-10)
"Test point"#10 [mil]
  rrect50% 30x30 smd: 1(5,2)
"Test point"#11 [mil]
  rrect50% 30x30 smd: 1(-203.08,0)
"Test point"#12 [mil]
  rrect50% 30x30 smd: 1(36.92,-139.87)
"Test point"#13 [mil]
  rrect50% 30x30 smd: 1(-50.75,268.34)
"UR Pad" [mm]
  rrect50% 2.3x3.8 smd: 1(0,0)
WE-SLM [mm] "SMD Inductor, 4-Leads, Body 3.6 x 6.3 mm"
  rect 1.85x0.6 smd: 1(-2.275,0.635) 2(-2.275,-0.635) 3(2.275,-0.635) 4(2.275,0.635)
  silkscreen extent -3.17,-1.78 3.17,1.78, body extent -3,-1.65 3,1.65, height 3.2
WE-TVS_SOT23-6L [mm] "TVS Diode, package SOT23-6L"
  rect 0.6x1.1 smd: 1(-0.95,-1.25) 2(0,-1.25) 3(0.95,-1.25) 4(0.95,1.25) 5(0,1.25) 6(-0.95,1.25)
  silkscreen extent -1.45,-0.45 1.45,0.45, body extent -1.45,-1.4 1.45,1.4, height 1.16
WE-XTAL_CFPX-180 [mm] "Quartz Crystal, size CFPX-180, body 3.4x2.7mm"
  rect 1.4x1.15 smd: 1(-1.1,-0.8) 2(1.1,-0.8) 3(1.1,0.8) 4(-1.1,0.8)
  silkscreen extent -2.35,-0.85 -2.15,-0.65, body extent -1.7,-1.35 1.7,1.35, height 0.65

## Part data
1V2: library part "Test point", "Power Supply for logical circuit"
"3.0V Voltage Regulator": library part CMP-0367-00154-2, "3.0 V, 50 ppm / degC, 50 uA Series (Bandgap) Voltage Reference, -40 to 125 degC, 3-pin SOT-23 (DBZ), Green (RoHS & no Sb/Br)", Manufacturer="Texas Instruments", Rating=Catalog, Temp Coeff(Max)(ppm/ degree C)=50, Temp Coeff(Typ)(ppm/ degree C)=20, Code_JEDEC=TO-236, ComponentLink1Description="Manufacturer URL", ComponentLink1URL=http://www.ti.com/, ComponentLink2Description=Datasheet, ComponentLink2URL=http://www.ti.com/general/docs/lit/getliterature.tsp?genericPartNumber=REF3030&fileType=pdf, ComponentLink3Description="Package Specification", ComponentLink3URL=http://www.ti.com/litv/pdf/mpds108a, DatasheetVersion=SBVS032F, Eco-Plan="Green (RoHS & no Sb/Br)", Mounting Technology="Surface Mount", PackageDescription="3-Pin Plastic Small Outline, Body 2.92 x 1.3 mm, Pitch 0.95 mm", PackageReference=DBZ0003A, PackageVersion=4203227/B, PartNumber=REF3030AIDBZR, SubFamily="Series Voltage Reference"
"3.3V Voltage Regulator": library part CMP-0062-01754-3, "400mA and 500mA Voltage Regulator, 4-pin SOT-223, Pb-Free", Manufacturer="Texas Instruments", PackageTopMarking=XYTT*L69B, PowerWise=N, Code_IPC=SOT223-4, Code_JEDEC=TO-261-AA, ComponentLink1Description="Datasheet URL", ComponentLink1URL=http://www.ti.com/general/docs/lit/getliterature.tsp?genericPartNumber=LM2937-3.3&fileType=pdf, CompType="LDO IC", PackageDescription="Molded SOT-223, 6.50 x 3.56 x 1.6mm Body, 4 Lead, 2.3mm Pitch", PackageReference=DCY0004A, PinCount=4, RoHS=Y
3V3: library part "Test point", "Power Supply for uC"
"AFE BAT" C1 C1 C2 C2 C3 C3 C4 C4 CANH CANL CHG CHG Driver_BAT DSG DSG "FET CHG" "FET DSG" PACK+ SCL SDA T1 T2 T3 TP1 TP2 TP9 TP10 TP18 TS1: library part "Test point"
"Bat +" "Bat -" "Pack +" "Pack -": library part 7461096, "WP-SHFU Press-Fit with External thread, full plain, 7x7mm, 9 pins, M4x6mm, 130A", Operating Temperature="-55 to +150degC", Rated Current=130A, ComponentLink1Description=Manufacturer, ComponentLink1URL=http://www.we-online.de, ComponentLink2Description=Datasheet, ComponentLink2URL=https://katalog.we-online.com/em/datasheet/7461096.pdf, Height=9mm, Material=Brass, Mounting Technology=Press-Fit, Packaging=Bulk, Part Number=7461096, Pin Number=9, Published Date="September 2019", Publisher="Wurth Elektronik", Size=7x7mm, Surface=Tin, Thread=M4, Thread Length=6mm
BQ: "AFE Cell battery monitor", Manufacturer="Texas Instruments", PartNumber=BQ7692000PWR, Copyright="Copyright (C) 2018 Accelerated Designs. All rights reserved", RefDes=RefDes, Type=DEV
BQ_NTC CHG_NTC DSG_NTC: library part "Res Thermal", "Thermistor", Code_IPC=RESC2012, LatestRevisionDate=29-May-2009, LatestRevisionNote="IPC-7351 Footprint Added.", PackageDescription="Chip Resistor 0805 Case Size", PackageReference=6-0805, PackageVersion=Mar-2003, Published=24-Mar-1999, Publisher="Altium Limited"
C1 C2 C3 C4 C5 C6 C7 C8 C9 C10 C11 C12 C13 C14 C15 C16 C17 C18 C19 C20 C21 C22 C23 C24 C25 C26 C27 C28 C29 C30 C31 C32 C33 C34 C35 C36 C37 C38 C39 C40 C41 C_Alert: library part Cap, "Capacitor", LatestRevisionDate=17-Jul-2002, LatestRevisionNote="Re-released for DXP Platform.", PackageDescription="Radial Cap, Thru-Hole; 2 Leads; 0.3 in Pin Spacing", PackageReference=RAD-0.3, Published=8-Jun-2000, Publisher="Altium Limited"
"CAN Transceiver": library part CMP-0315-00046-3, "CAN Bus Transceiver, 3.3 V, -40 to 85 degC, 8-Pin SOIC (D), Green (RoHS & no Sb/Br), Tube", Generic Part Number=SN65HVD230, Supply Voltage Max="3.6 V", Supply Voltage Min="3 V", Temperature Max="85 degC", Temperature Min="-40 degC", ComponentLink1Description="Manufacturer URL", ComponentLink1URL=http://www.ti.com/, ComponentLink2Description=Datasheet, ComponentLink2URL="http://www.ti.com/general/docs/lit/getliterature.tsp?genericGeneric Part Number=SN65HVD230&fileType=pdf", DatasheetVersion=SLOS346N, Mounting Technology="Surface Mount", PackageDescription="8-Pin Plastic Small Outline, Body 4.9 x 3.9 mm, Pitch 1.27 mm", Packing=Tube, PartNumber=SN65HVD230D, RoHS=TRUE
D1: "Zener Diode", LatestRevisionDate=17-Jul-2002, LatestRevisionNote="Re-released for DXP Platform.", PackageDescription="Diode, Thru-Hole; 2 Leads; 0.7 in Pin Spacing", PackageReference=DIODE-0.7, Published=8-Jun-2000, Publisher="Altium Limited"
D_feedback: "Default Diode", Code_JEDEC=DO-214-AB, LatestRevisionDate=17-Jul-2002, LatestRevisionNote="Re-released for DXP Platform.", PackageDescription="DO-214-AB/SMC; 2 C-Bend Leads; Body 7.9 x 5.9 mm, inc. leads (LxW)", PackageReference=SMC, PackageVersion=Sep-1996, Published=8-Jun-2000, Publisher="Altium Limited"
Diode1 MOSFET1 MOSFET2 MOSFET3 MOSFET4 "R_Shunt 300uR": "No Description Available", Copyright="Copyright (C) 2018 Accelerated Designs. All rights reserved", RefDes=RefDes, Type=DEV
  Diode1: Built_By=EMA_UL_Team, Manufacturer_Part_Number=LL4148-GS08, SourceLibrary=Vishay_2020-02-10, Vendor=Vishay
  MOSFET1 MOSFET2 MOSFET3 MOSFET4: Built_By=EMA_Cory, Datasheet=https://www.infineon.com/dgdl/Infineon-IRFS7430-DS-v01_00-EN.pdf?fileId=5546d462576f3475015792dbfbd6000d, Manufacturer_Part_Number=IRFS7430TRLPBF, SourceLibrary=Infineon_2020-06-10, Vendor=Infineon
  "R_Shunt 300uR": Built_By=EMA_Anthony, Manufacturer_Part_Number=LRMAP3920B-R0003FT, SourceLibrary=Welwyn_2019-11-05, Vendor=Welwyn
L1: library part CMP-0222-00021-1, "SMD Common Mode Line Filter WE-SLM, L = 100 µH", Inductance="100 ÂµH", ComponentLink1Description="Manufacturer Link", ComponentLink1URL=http://www.we-online.com, ComponentLink2Description=Datasheet, ComponentLink2URL=http://www.we-online.de/katalog/media/pdf/744242101.pdf, DatasheetVersion="ver 3, Feb-2006", PackageDescription="SMD Inductor, 4-Leads, Body 3.6 x 6.3 mm", PackageReference=WE-SLM, PackageVersion=2006
LED_1 LED_2 LED_3V LED_3V3 LED_REGOUT: library part LED0, "Typical INFRARED GaAs LED", LatestRevisionDate=08-Jul-2005, LatestRevisionNote="Mech Layer 1 removed.", PackageDescription="LED; 2 Leads", PackageReference=LED-0, Published=8-Jun-2000, Publisher="Altium Limited"
"NFET driver": "high-side NFET driver", Manufacturer="Texas Instruments", PartNumber=BQ76200PWR, Alternate_PartNumber=BQ76200PW, CompType=IC, Copyright="Copyright (C) 2018 Accelerated Designs. All rights reserved", MountType=SMT, PackageReference=PW0016A, PIN_COUNT=16, RefDes=RefDes, RoHS=Y, Type=DEV
P1: library part CMP-1502-00442-1, "THT Male Header WR-MPC3, Vertical, Single Row, pitch 3 mm, 4 pins", Contact Resistance=10mOhm, Manufacturer="Wurth Elektronik", Operating Temperature=-40to105degC, Working Voltage=250VAC, Datasheet URL=https://katalog.we-online.de/em/datasheet/6620xx11122.pdf, Gender=Male, Manufacturer URL=http://www.we-online.de, Mounting Technology=THT, Orientation=Vertical, Package Reference=66200411122, Packaging=Tube, Part Number=66200411122, Pin Number=4, Pitch=3mm, Publisher=WurthElektronik
P2: library part CMP-1502-00775-1, "Male Shrouded Header WR-WTB, SMT, Right Angled, pitch 1.25 mm, 1 x 6 position", Contact Resistance=20mOhm, Manufacturer="Wurth Elektronik", Operating Temperature=-40to85degC, Working Voltage=125VAC, Datasheet URL=https://katalog.we-online.de/em/datasheet/6531xx131822.pdf, Gender=Male, Manufacturer URL=http://www.we-online.de, Mounting Technology=SMT, Orientation=RightAngled, Package Reference=653106131822, Packaging=TapeandReel, Part Number=653106131822, Pitch=1.25mm, Position=1x6, Publisher=WurthElektronik
Quartz: library part 830108207109, "WE-XTAL Quartz Crystal, SMT, CFPX-180, 16MHz, +/-10ppm", Frequency Stability=+/-20ppm, Frequency Tolerance=+/-10ppm, Load Capacitance=8pF, Manufacturer="Wurth Elektronik", Operating Temperature="-40 to +85degC", ComponentLink1Description=Manufacturer, ComponentLink1URL=http://www.we-online.de, ComponentLink2Description=Datasheet, ComponentLink2URL=https://katalog.we-online.com/pbs/datasheet/830108207109.pdf, Frequency=16MHz, Manufacturer Part Number=830108207109, Mounting Technology=SMT, Packaging="Tape and Reel", Published Date="July 2020", Size=CFPX-180
R1 R2 R3 R4 R5 R6 R7 R8 R9 R10 R11 R12 R13 R14 R15 R16 R17 R18 R19 R20 R21 R22 R23 R24 R25 R26 R27 R28 R29 R30 R31 R32 R33 R34 R35 R36 R37 R38 R39 R40 R41 R42 R43 R44 R45 R46 R47 R48 R49 R50 R51 R52 R54 R_Alert: library part Res2, "Resistor", LatestRevisionDate=17-Jul-2002, LatestRevisionNote="Re-released for DXP Platform.", PackageDescription="Axial Device, Thru-Hole; 2 Leads; 0.4 in Pin Spacing", PackageReference=AXIAL-0.4, Published=8-Jun-2000, Publisher="Altium Limited"
Signal: library part CMP-1502-00845-1, "Female THT Straight Connector without Latch and without Polarization WR-MM, 12 pins", Contact Resistance=10mOhm, Insulation Resistance=>1000MOhm, Manufacturer="Wurth Elektronik", Operating Temperature=-40to105degC, Rated Current=1.5A, Withstanding Voltage=500VAC, Working Voltage=100VAC, Datasheet URL=https://katalog.we-online.de/em/datasheet/690367181272.pdf, Gender=Female, Manufacturer URL=http://www.we-online.de, Mounting Technology=THT, Package Reference=690367181272, Packaging=Tube, Part Number=690367181272, Pin Number=12, Pitch=2.54mm, Publisher=WurthElektronik
TVS: library part 824013, "WE-TVS TVS Diode - High Speed Series, SOT23-6L, 4+1Channel, 3.3Vdc", Channel Input Capacitance=3pF, DC Operating Voltage=3.3V, Manufacturer="Wurth Elektronik", Operating Temperature="-40 to +125degC", Reverse Breakdown Voltage min.=4.5V, Reverse Channel Leakage Current=5uA, Reverse Peak Pulse Current=12A, Channel=4+1, ComponentLink1Description=Manufacturer, ComponentLink1URL=http://www.we-online.de, ComponentLink2Description=Datasheet, ComponentLink2URL=https://www.we-online.com/catalog/datasheet/824013.pdf, Manufacturer Part Number=824013, Mounting Technology=SMT, Packaging="Tape and Reel", Published Date="April 2020", Size=SOT23-6L
"TVS Diode": library part CMP-1485-00002-1, "TVS Diode WE-TVS-Standard, VRWM=5.0V", Manufacturer="Wuerth Elektronik", Reverse Stand Off Voltage=5V, ComponentLink1Description="Manufacturer URL", ComponentLink1URL=http://www.we-online.com, ComponentLink2Description=Datasheet, ComponentLink2URL=http://katalog.we-online.de/kataloge/eisos/media/pdf/824022.pdf, PackageReference=SOT23_3L, PartNumber=824022
uC: library part CMP-0945-00001-2, "Tiva C Series Microcontroller, 256 KB Flash, 32 KB SRAM, 12 Bit, 12 Channels, -40 to 105 degC, 64-Pin LQFP (PM), Green (RoHS & no Sb/Br)", Manufacturer="Texas Instruments", Temperature Range="-40 to 105 degC", ADC Channels=12, ADC Resolution="12 Bit", ComponentLink1Description="Manufacturer URL", ComponentLink1URL=http://www.ti.com/, ComponentLink2Description=Datasheet, ComponentLink2URL=http://www.ti.com/lit/ds/symlink/tm4c123gh6pm.pdf, ComponentLink3Description="Package Specification", ComponentLink3URL=http://www.ti.com/litv/pdf/mtqf008a, Data Memory="32 KB", DatasheetVersion="Rev. 15741.2722", GPIOs=43, I2C=2, Max Speed="80 MHz", Mounting Technology="Surface Mount", PackageDescription="64-Pin Plastic Quad Flatpack, Body 10 x 10 mm, Pitch 0.5 mm", PackageReference=PM0064A, PackageVersion=4040152/C, PartNumber=TM4C123GH6PMT, Prefix="Qualified Device", Program Memory="256 KB", RoHS=TRUE, Tiva Series="Connected MCUs", UART=4
URX UTX: library part "UR Pad"

## Free pads (board coordinates)
  round 24 hole 12: 21(3800,580) 21(3800,615) 21(3800,650) 21(3800,685) 21(3800,720) 21(3800,755) 21(3800,795) 21(3800,830) 21(3800,865) 21(3800,900) 21(3800,935) 21(3800,970) 21(3800,1045) 21(3800,1080) 21(3800,1115) 21(3800,1150) 21(3800,1185) 21(3800,1220) 21(3800,1255) 21(3800,1290) 21(3800,1325) 21(3800,1360) 21(3800,1395) 21(3800,1430) 21(4160,580) 21(4160,615) 21(4160,650) 21(4160,685) 21(4160,720) 21(4160,755) 21(4160,795) 21(4160,830) 21(4160,865) 21(4160,900) 21(4160,935) 21(4160,970) 21(4160,1045) 21(4160,1080) 21(4160,1115) 21(4160,1150) 21(4160,1185) 21(4160,1220) 21(4160,1255) 21(4160,1290) 21(4160,1325) 21(4160,1360) 21(4160,1395) 21(4160,1430) 22(3835,580) 22(3835,615) 22(3835,650) 22(3835,685) 22(3835,720) 22(3835,755) 22(3835,795) 22(3835,830) 22(3835,865) 22(3835,900) 22(3835,935) 22(3835,970) 22(3835,1045) 22(3835,1080) 22(3835,1115) 22(3835,1150) 22(3835,1185) 22(3835,1220) 22(3835,1255) 22(3835,1290) 22(3835,1325) 22(3835,1360) 22(3835,1395) 22(3835,1430) 22(4195,580) 22(4195,615) 22(4195,650) 22(4195,685) 22(4195,720) 22(4195,755) 22(4195,795) 22(4195,830) 22(4195,865) 22(4195,900) 22(4195,935) 22(4195,970) 22(4195,1045) 22(4195,1080) 22(4195,1115) 22(4195,1150) 22(4195,1185) 22(4195,1220) 22(4195,1255) 22(4195,1290) 22(4195,1325) 22(4195,1360) 22(4195,1395) 22(4195,1430) 23(3870,580) 23(3870,615) 23(3870,650) 23(3870,685) 23(3870,720) 23(3870,755) 23(3870,795) 23(3870,830) 23(3870,865) 23(3870,900) 23(3870,935) 23(3870,970) 23(3870,1045) 23(3870,1080) 23(3870,1115) 23(3870,1150) 23(3870,1185) 23(3870,1220) 23(3870,1255) 23(3870,1290) 23(3870,1325) 23(3870,1360) 23(3870,1395) 23(3870,1430) 23(4230,580) 23(4230,615) 23(4230,650) 23(4230,685) 23(4230,720) 23(4230,755) 23(4230,795) 23(4230,830) 23(4230,865) 23(4230,900) 23(4230,935) 23(4230,970) 23(4230,1045) 23(4230,1080) 23(4230,1115) 23(4230,1150) 23(4230,1185) 23(4230,1220) 23(4230,1255) 23(4230,1290) 23(4230,1325) 23(4230,1360) 23(4230,1395) 23(4230,1430) 24(3905,580) 24(3905,615) 24(3905,650) 24(3905,685) 24(3905,720) 24(3905,755) 24(3905,795) 24(3905,830) 24(3905,865) 24(3905,900) 24(3905,935) 24(3905,970) 24(3905,1045) 24(3905,1080) 24(3905,1115) 24(3905,1150) 24(3905,1185) 24(3905,1220) 24(3905,1255) 24(3905,1290) 24(3905,1325) 24(3905,1360) 24(3905,1395) 24(3905,1430) 24(4265,580) 24(4265,615) 24(4265,650) 24(4265,685) 24(4265,720) 24(4265,755) 24(4265,795) 24(4265,830) 24(4265,865) 24(4265,900) 24(4265,935) 24(4265,970) 24(4265,1045) 24(4265,1080) 24(4265,1115) 24(4265,1150) 24(4265,1185) 24(4265,1220) 24(4265,1255) 24(4265,1290) 24(4265,1325) 24(4265,1360) 24(4265,1395) 24(4265,1430) 25(3940,580) 25(3940,615) 25(3940,650) 25(3940,685) 25(3940,720) 25(3940,755) 25(3940,795) 25(3940,830) 25(3940,865) 25(3940,900) 25(3940,935) 25(3940,970) 25(3940,1045) 25(3940,1080) 25(3940,1115) 25(3940,1150) 25(3940,1185) 25(3940,1220) 25(3940,1255) 25(3940,1290) 25(3940,1325) 25(3940,1360) 25(3940,1395) 25(3940,1430) 25(4300,580) 25(4300,615) 25(4300,650) 25(4300,685) 25(4300,720) 25(4300,755) 25(4300,795) 25(4300,830) 25(4300,865) 25(4300,900) 25(4300,935) 25(4300,970) 25(4300,1045) 25(4300,1080) 25(4300,1115) 25(4300,1150) 25(4300,1185) 25(4300,1220) 25(4300,1255) 25(4300,1290) 25(4300,1325) 25(4300,1360) 25(4300,1395) 25(4300,1430) 28(4010,580) 28(4010,615) 28(4010,650) 28(4010,685) 28(4010,720) 28(4010,755) 28(4010,795) 28(4010,830) 28(4010,865) 28(4010,900) 28(4010,935) 28(4010,970) 28(4010,1045) 28(4010,1080) 28(4010,1115) 28(4010,1150) 28(4010,1185) 28(4010,1220) 28(4010,1255) 28(4010,1290) 28(4010,1325) 28(4010,1360) 28(4010,1395) 28(4010,1430) 28(4370,580) 28(4370,615) 28(4370,650) 28(4370,685) 28(4370,720) 28(4370,755) 28(4370,795) 28(4370,830) 28(4370,865) 28(4370,900) 28(4370,935) 28(4370,970) 28(4370,1045) 28(4370,1080) 28(4370,1115) 28(4370,1150) 28(4370,1185) 28(4370,1220) 28(4370,1255) 28(4370,1290) 28(4370,1325) 28(4370,1360) 28(4370,1395) 28(4370,1430) 29(4045,580) 29(4045,615) 29(4045,650) 29(4045,685) 29(4045,720) 29(4045,755) 29(4045,795) 29(4045,830) 29(4045,865) 29(4045,900) 29(4045,935) 29(4045,970) 29(4045,1045) 29(4045,1080) 29(4045,1115) 29(4045,1150) 29(4045,1185) 29(4045,1220) 29(4045,1255) 29(4045,1290) 29(4045,1325) 29(4045,1360) 29(4045,1395) 29(4045,1430) 29(4405,580) 29(4405,615) 29(4405,650) 29(4405,685) 29(4405,720) 29(4405,755) 29(4405,795) 29(4405,830) 29(4405,865) 29(4405,900) 29(4405,935) 29(4405,970) 29(4405,1045) 29(4405,1080) 29(4405,1115) 29(4405,1150) 29(4405,1185) 29(4405,1220) 29(4405,1255) 29(4405,1290) 29(4405,1325) 29(4405,1360) 29(4405,1395) 29(4405,1430) 30(3975,580) 30(3975,615) 30(3975,650) 30(3975,685) 30(3975,720) 30(3975,755) 30(3975,795) 30(3975,830) 30(3975,865) 30(3975,900) 30(3975,935) 30(3975,970) 30(3975,1045) 30(3975,1080) 30(3975,1115) 30(3975,1150) 30(3975,1185) 30(3975,1220) 30(3975,1255) 30(3975,1290) 30(3975,1325) 30(3975,1360) 30(3975,1395) 30(3975,1430) 30(4335,580) 30(4335,615) 30(4335,650) 30(4335,685) 30(4335,720) 30(4335,755) 30(4335,795) 30(4335,830) 30(4335,865) 30(4335,900) 30(4335,935) 30(4335,970) 30(4335,1045) 30(4335,1080) 30(4335,1115) 30(4335,1150) 30(4335,1185) 30(4335,1220) 30(4335,1255) 30(4335,1290) 30(4335,1325) 30(4335,1360) 30(4335,1395) 30(4335,1430) 31(4080,580) 31(4080,615) 31(4080,650) 31(4080,685) 31(4080,720) 31(4080,755) 31(4080,795) 31(4080,830) 31(4080,865) 31(4080,900) 31(4080,935) 31(4080,970) 31(4080,1045) 31(4080,1080) 31(4080,1115) 31(4080,1150) 31(4080,1185) 31(4080,1220) 31(4080,1255) 31(4080,1290) 31(4080,1325) 31(4080,1360) 31(4080,1395) 31(4080,1430) 31(4440,580) 31(4440,615) 31(4440,650) 31(4440,685) 31(4440,720) 31(4440,755) 31(4440,795) 31(4440,830) 31(4440,865) 31(4440,900) 31(4440,935) 31(4440,970) 31(4440,1045) 31(4440,1080) 31(4440,1115) 31(4440,1150) 31(4440,1185) 31(4440,1220) 31(4440,1255) 31(4440,1290) 31(4440,1325) 31(4440,1360) 31(4440,1395) 31(4440,1430)

## Via types
v1: diameter 24, hole 12, Top Layer to Bottom Layer, 77 vias
v2: diameter 28, hole 12, Top Layer to Bottom Layer, 1 vias